# Altium PCB PCB_Power_Jack.PcbDoc
Units mm, origin at the board's own origin, x right, y up, seen from the top; angles counter-clockwise.
Board outline 33.78 x 32.13 mm, 2 copper layers (Top Layer, Bottom Layer), stack 1.571 mm thick; 9 components, 2 nets, 31 pads, 192 vias.
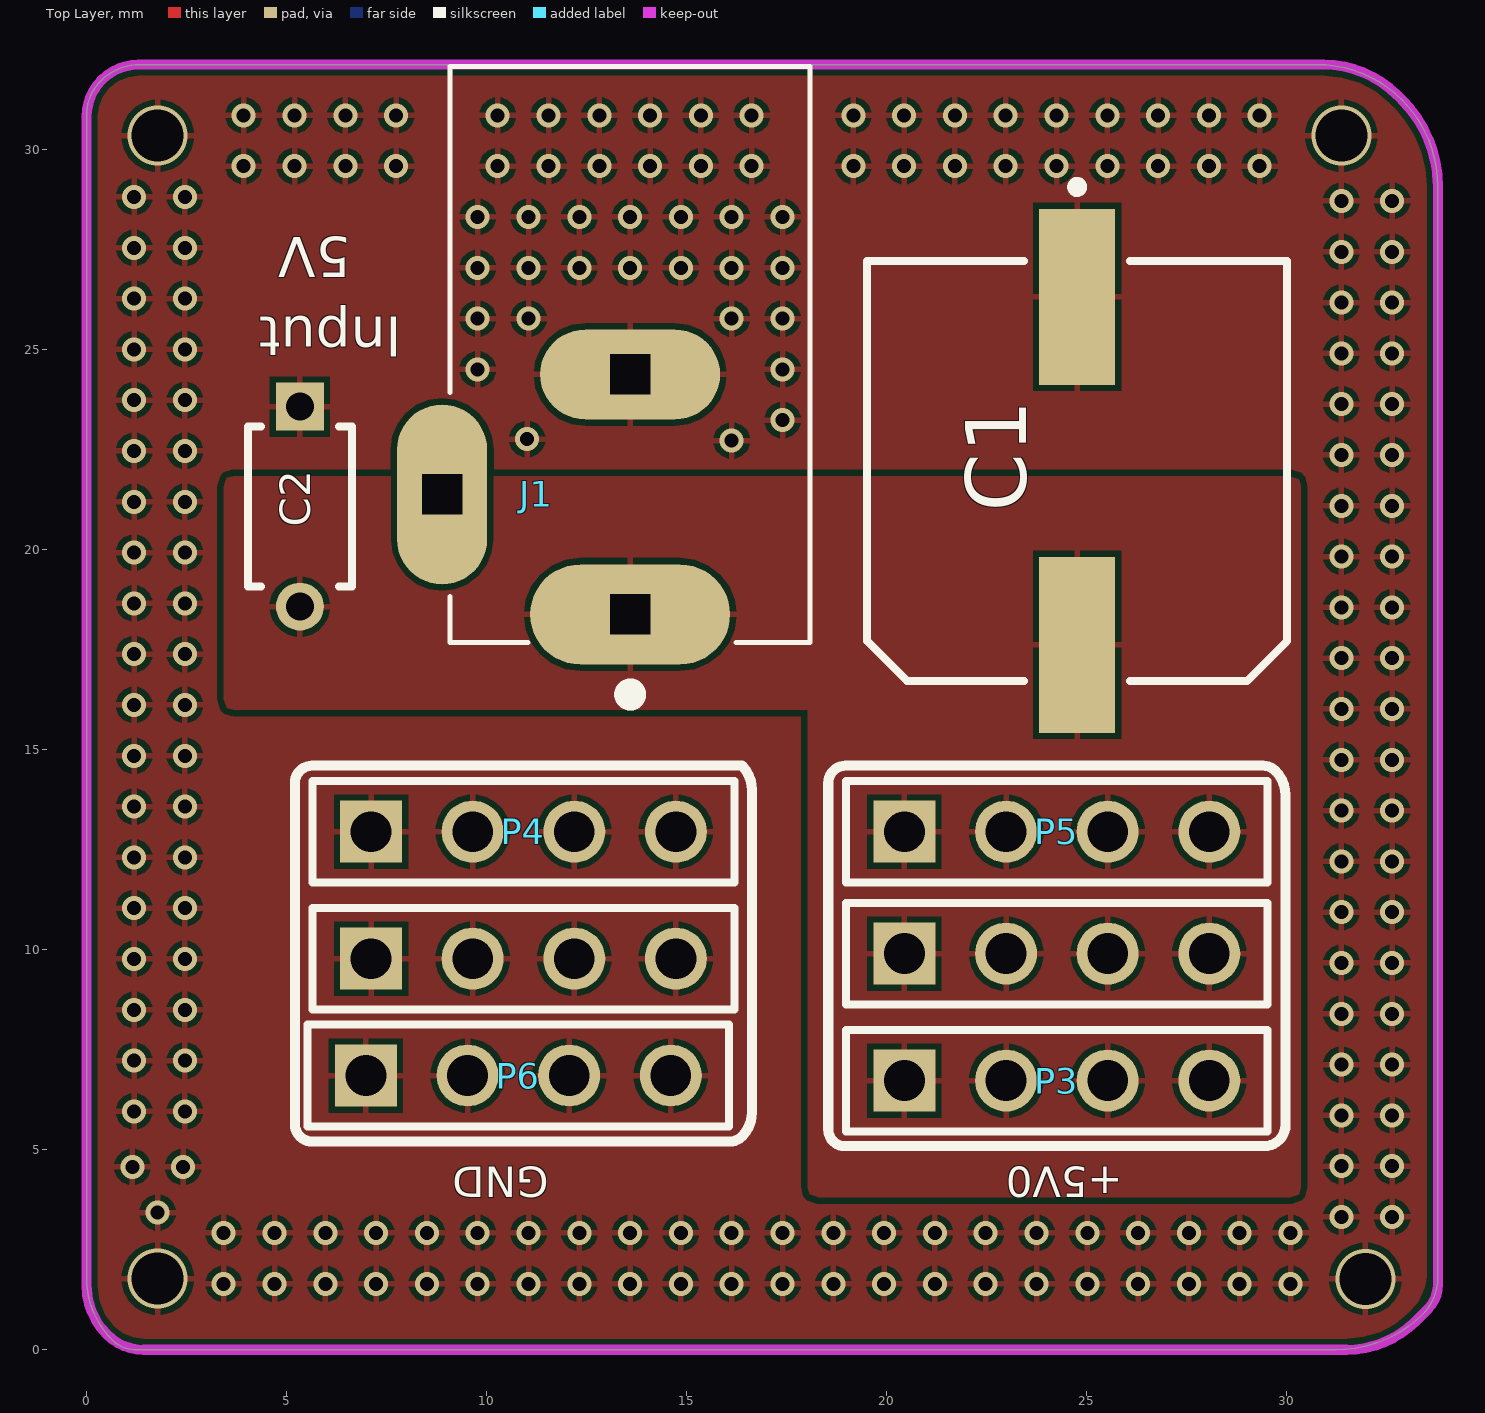
[diagram p0: Top Layer view]
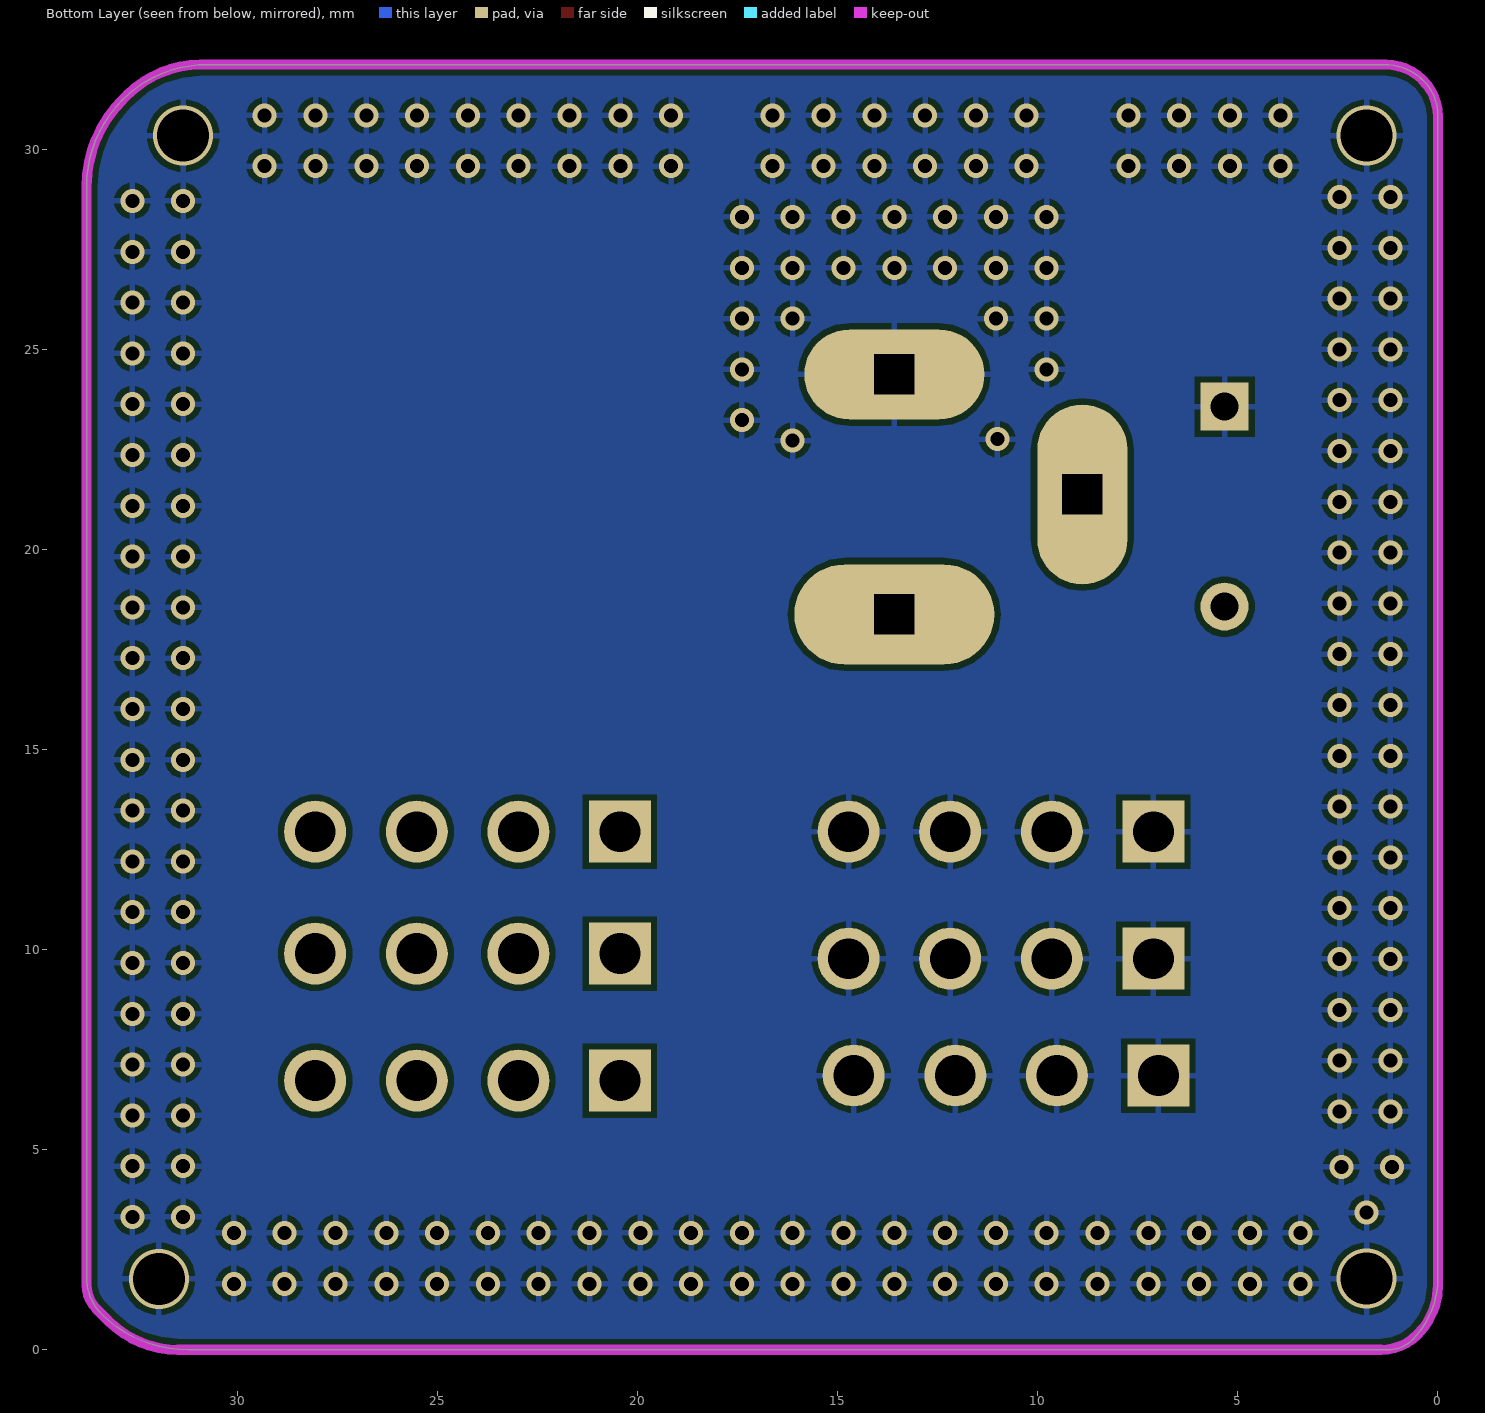
[diagram p1: Bottom Layer view, seen from below]
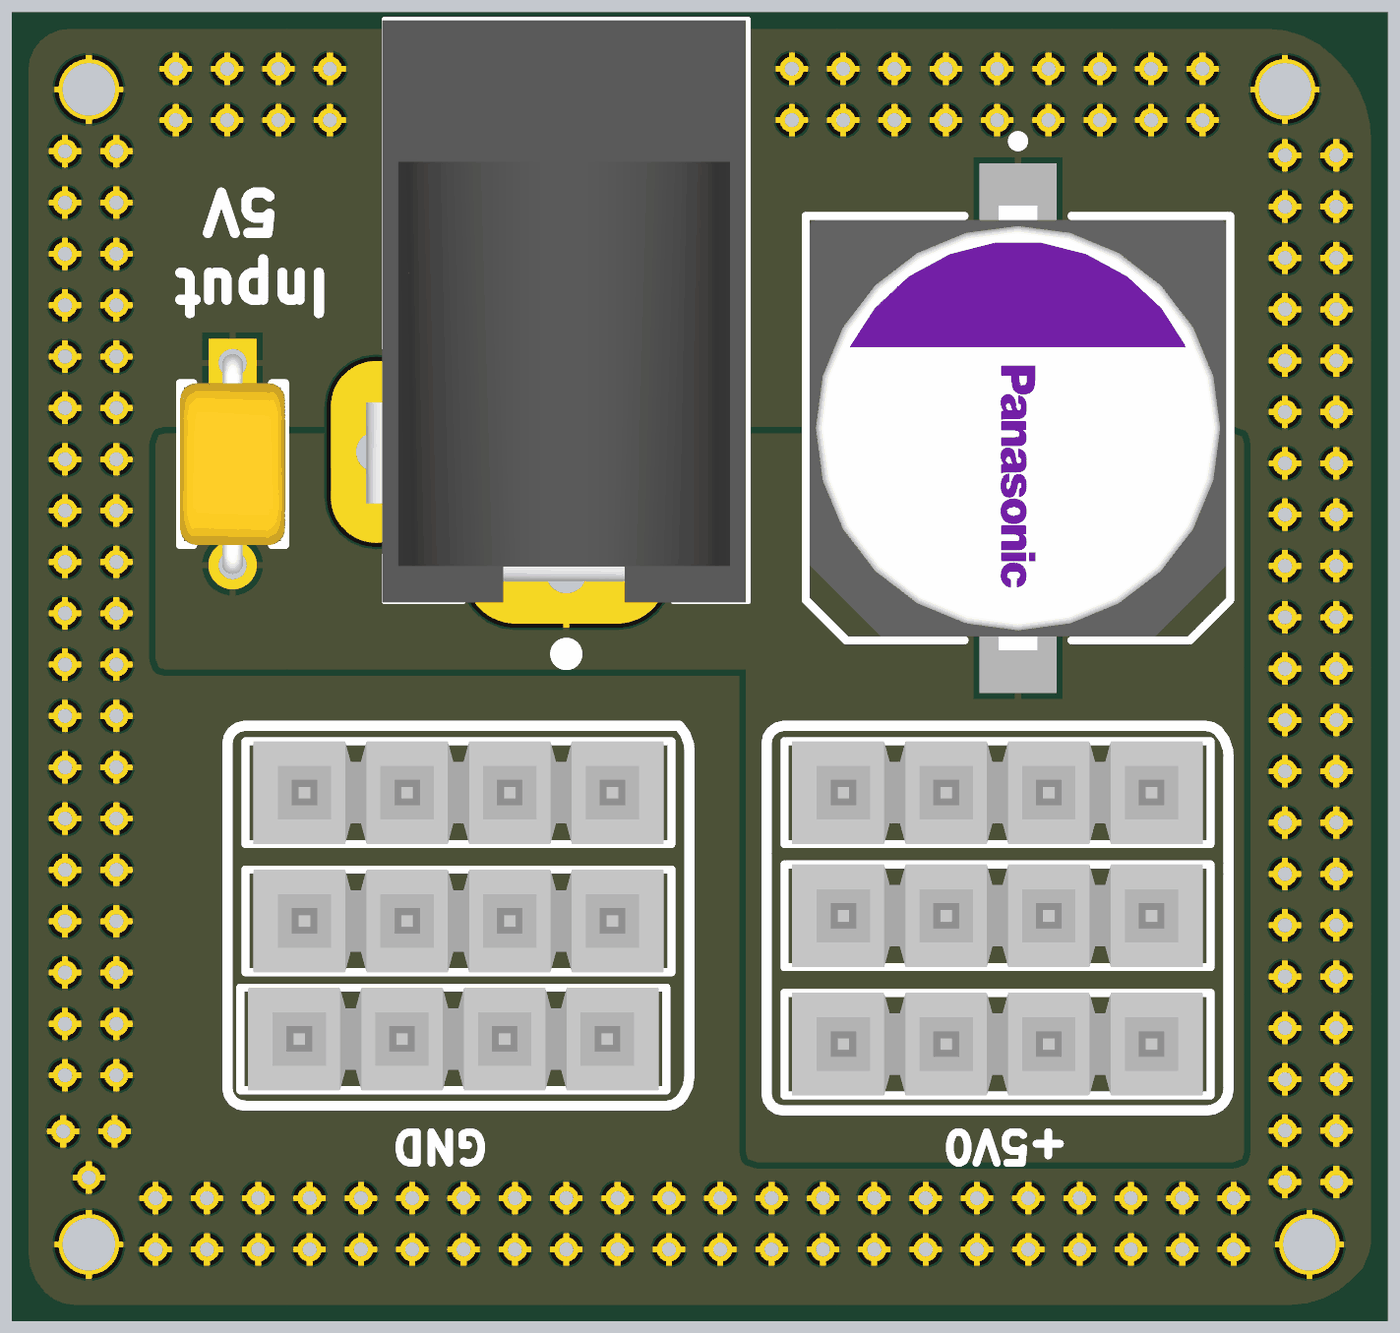
[diagram p2: 3D render of the assembled board from above, using the file's embedded part models]

## Layer stack, top to bottom
Top Solder: solder mask 0.0102, Solder Resist, Dk 3.5
Top Layer: signal copper 0.0356
Dielectric 1: dielectric 1.5, FR-4, Dk 4.8
Bottom Layer: signal copper 0.0356
Bottom Solder: solder mask 0.0102, Solder Resist, Dk 3.5

## Board outline
0.635,0.254 cw(c2.168,1.787) 0,1.787 0,30.861 cw(c1.226,30.861) 0.359,31.728 cw(c1.332,30.756) 1.332,32.131 30.76,32.131 cw(c30.76,29.127) 32.884,31.251 cw(c30.716,29.083) 33.782,29.083 33.782,1.796 cw(c32.512,1.796) 33.41,0.898 cw(c31.242,3.066) 31.242,0 1.524,0 1.248,0 cw(c1.248,0.867)

## Design rules (kind name [scope] priority, off if disabled: settings)
Clearance [All] p1: gap=0.15 ignorepadtopadclearanceinfootprint=FALSE
HoleSize HoleSize_Jack [InComponent('J1')] p1: absolutevalues=TRUE maxlimit=5 minlimit=0.025 maxpercent=80.000 minpercent=20.000
HoleSize [All] p2: absolutevalues=TRUE maxlimit=2.54 minlimit=0.025 maxpercent=80.000 minpercent=20.000
PolygonConnect [All] p1: connectstyle=Relief reliefconductorwidth=0.15 reliefentries=4 polygonreliefangle="90 Angle" airgapwidth=0.15
RoutingVias [All] p1: holewidth=0.3 width=0.4 viastyle="Through Hole" minholewidth=0.2 minwidth=0.3 maxholewidth=0.8 maxwidth=1.5
SilkToSolderMaskClearance SilkToSolderMaskClearance_Jack [InComponent('J1')] p1: minsilkscreentomaskgap=0.1 clearancetoexposedcopper=TRUE
SilkToSolderMaskClearance [IsPad] p2: minsilkscreentomaskgap=0.254 clearancetoexposedcopper=TRUE
SolderMaskExpansion [All] p1: expansion=0.102 istentingtop=FALSE
SupplyNets "Schematic Supply Nets_1" [InNet('GND')] p1: voltage=0.000
SupplyNets "Schematic Supply Nets" [InNet('+5V0')] p2: voltage=0.000
Width [All] p1: maxlimit=2 minlimit=0.254 preferedwidth=0.254 minimp=50.000000 maximp=50.000000 favimp=50.000000
28 further rules are at their usual default settings.

## Components (designator, comment, footprint, x,y, rotation, side; value= is the part's Value field where it differs from the comment)
+5V0 "TSW-104-08-G-S" SMTC-TSW-104-08-X-S 20.447,9.906 r0 top (schematic designator P1)
C1 "1000uF 16V" FP-OS-CON-SMT-F10-MFG 24.765,21.971 r270 top
C2 "Cer 0.1uF 50V" FP-K15H5-MFG 5.334,21.082 r270 top
GND "TSW-104-08-G-S" SMTC-TSW-104-08-X-S 7.112,9.779 r0 top (schematic designator P2)
J1 "PJ-002A" CUI_PJ-002A 13.589,18.384 r90 top
P3 "TSW-104-08-G-S" SMTC-TSW-104-08-X-S 20.447,6.731 r0 top
P4 "TSW-104-08-G-S" SMTC-TSW-104-08-X-S 7.112,12.954 r0 top
P5 "TSW-104-08-G-S" SMTC-TSW-104-08-X-S 20.447,12.954 r0 top
P6 "TSW-104-08-G-S" SMTC-TSW-104-08-X-S 6.985,6.858 r0 top

## Footprints (in the part's own frame and the unit in brackets; to place one, negate y for a bottom-side part, rotate by r counter-clockwise, add the part's x,y. Pads: shape width x height; smd on the part's side, far side on the other; paste and mask are expansions set on the pad)
CUI_PJ-002A [mm]
  oval 2.5x5 hole 1 square: 1(0,0)
  oval 2.25x4.5 hole 1 square: 2(6,0)
  oval 4.5x2.25 hole 1 square: 3(3,4.7)
  silkscreen extent -2.2,-4.5 13.7,4.5, body extent -0.72,-4.44 13.68,4.96, height 11.2
FP-K15H5-MFG [mm]
  rect 1.2x1.2 hole 0.7 paste-2539.97 mask+0: 1(-2.5,0)
  round 1.2 hole 0.7 paste-2539.97 mask+0: 2(2.5,0)
  silkscreen extent -2,-1.3 2,1.3, body extent -3.2,-1.4 3.2,1.4, height 0.25
FP-OS-CON-SMT-F10-MFG [mm]
  rect 4.4x1.9 smd paste+0 mask+0: 1(-4.35,0) 2(4.35,0)
  silkscreen extent -7.22,-5.25 5.25,5.25, body extent -6.8,-5.5 6.8,5.5, height 0.25
SMTC-TSW-104-08-X-S [mm] ".025 SQ Post Terminal Strip Assembly, 1x4 Pins, Vertical, 2.54mm Pitch, Male"
  rect 1.55x1.55 hole 1.02: 1(0,0)
  round 1.55 hole 1.02: 2(2.54,0) 3(5.08,0) 4(7.62,0)
  silkscreen extent -1.46,-1.27 9.08,1.27, body extent -1.27,-1.27 8.89,1.27, height 8.38

## Part data
+5V0 GND P3 P4 P5 P6: library part CMP-1024-00357-1, "0.025\" SQ Post Header, Through-hole, Vertical, -55 to 125 degC, 2.54 mm Pitch, 4-Pin, Male, RoHS", Manufacturer=Samtec, Temperature Range="-55 to 125 degC", ComponentLink1Description="Manufacturer URL", ComponentLink1URL=http://www.samtec.com, ComponentLink2Description=Datasheet, ComponentLink2URL=http://www.samtec.com/documents/webfiles/pdf/TSW_TH.PDF, ComponentLink3Description="Package Specification", ComponentLink3URL=http://www.samtec.com/documents/webfiles/cpdf/TSW-XXX-XX-XXX-X-XX-XXX-MKT.pdf, DatasheetVersion=F-214, Mounting Technology=Through-hole, Orientation=Vertical, PackageDescription=".025[0.64] SQ. Post Terminal Strip Assembly", PackageReference=TSW-104-08-X-S, PackageVersion="DM, 8/1988", PartNumber=TSW-104-08-G-S, Pitch="2.54 mm", RoHS=True
C1: library part CMP-05428-000276-1, "CAP ALUM POLY 1000UF 20% 16V SMD", RoHS Compliant=Yes
C2: library part CMP-02417-000078-1, "CAP CER 0.1UF 50V X7R RADIAL", Capacitance=100nF, Case/Package=Dipped, Dielectric=X7R, Dielectric Material=Ceramic, Max Operating Temperature=125°C, Min Operating Temperature=-55°C, Package Quantity=1, Tolerance=10%, Voltage=50V, Construction=RADIAL, Depth=2.5mm, Diameter=500um, Height=4mm, Height - Seated (Max)=0.257inch, Lead Diameter=0.5mm, Lead Free="Lead Free", Lead Length=30mm, Lead Pitch=5mm, Lead/Base Style="Formed Leads", Length=4mm, Mount="Through Hole", Packaging="Tape and Reel", Radiation Hardening=No, RoHS Compliant=Yes, Series=K, Termination=Radial, Thickness=2.6mm, Voltage Rating=50V, Voltage Rating (DC)=50V, Weight=0.005644oz, Width=2.5mm
J1: "2.0 x 6.5 mm, 2.5 A, Horizontal, Through Hole, Dc Power Jack Connector", Package=None, Check_prices=https://www.snapeda.com/parts/PJ-002A/Same+Sky/view-part/?ref=eda, MF="Same Sky", MP=PJ-002A, SnapEDA_Link=https://www.snapeda.com/parts/PJ-002A/Same+Sky/view-part/?ref=snap

## Via types
v1: diameter 0.6, hole 0.35, Top Layer to Bottom Layer, 188 vias
v2: diameter 1.5, hole 1.3, Top Layer to Bottom Layer, 4 vias

## Nets (pads, with @x,y where several pads share a name; then routed paths per layer and width w, separated by ;. In a path a pad name is that pad's centre, name@x,y a point inside that pad or via, vN(x,y) a via of type N, cw(c..) or ccw(c..) an arc to the next point about the centre after c; other vN are vias at no path point)
+5V0: +5V0.1 +5V0.2 +5V0.3 +5V0.4 C1.2 C2.2 J1.1 P3.1 P3.2 P3.3 P3.4 P5.1 P5.2 P5.3 P5.4
GND: C1.1 C2.1 GND.1 GND.2 GND.3 GND.4 J1.2 P4.1 P4.2 P4.3 P4.4 P6.1 P6.2 P6.3 P6.4
  other v1: 3.429,1.651 4.699,1.651 5.969,1.651 7.239,1.651 8.509,1.651 9.779,1.651 11.049,1.651 12.319,1.651 13.589,1.651 14.859,1.651 16.129,1.651 17.399,1.651 18.669,1.651 19.939,1.651 21.209,1.651 22.479,1.651 23.749,1.651 25.019,1.651 26.289,1.651 27.559,1.651 28.829,1.651 30.099,1.651 3.429,2.921 4.699,2.921 5.969,2.921 7.239,2.921 8.509,2.921 9.779,2.921 11.049,2.921 12.319,2.921 13.589,2.921 14.859,2.921 16.129,2.921 17.399,2.921 18.669,2.921 19.939,2.921 21.209,2.921 22.479,2.921 23.749,2.921 25.019,2.921 26.289,2.921 27.559,2.921 28.829,2.921 30.099,2.921 31.369,3.321 32.639,3.321 1.778,3.429 1.143,4.572 2.413,4.572 31.369,4.591 32.639,4.591 31.369,5.861 32.639,5.861 1.189,5.961 2.459,5.961 31.369,7.131 32.639,7.131 1.189,7.231 2.459,7.231 31.369,8.401 32.639,8.401 1.189,8.501 2.459,8.501 31.369,9.671 32.639,9.671 1.189,9.771 2.459,9.771 31.369,10.941 32.639,10.941 1.189,11.041 2.459,11.041 31.369,12.211 32.639,12.211 1.189,12.311 2.459,12.311 31.369,13.481 32.639,13.481 1.189,13.581 2.459,13.581 31.369,14.751 32.639,14.751 1.189,14.851 2.459,14.851 31.369,16.021 32.639,16.021 1.189,16.121 2.459,16.121 31.369,17.291 32.639,17.291 1.189,17.391 2.459,17.391 31.369,18.561 32.639,18.561 1.189,18.661 2.459,18.661 31.369,19.831 32.639,19.831 1.189,19.931 2.459,19.931 31.369,21.101 32.639,21.101 1.189,21.201 2.459,21.201 31.369,22.371 32.639,22.371 1.189,22.471 2.459,22.471 16.129,22.733 11.014,22.765 17.399,23.241 31.369,23.641 32.639,23.641 1.189,23.741 2.459,23.741 9.779,24.511 17.399,24.511 31.369,24.911 32.639,24.911 1.189,25.011 2.459,25.011 9.779,25.781 11.049,25.781 16.129,25.781 17.399,25.781 31.369,26.181 32.639,26.181 1.189,26.281 2.459,26.281 9.779,27.051 11.049,27.051 12.319,27.051 13.589,27.051 14.859,27.051 16.129,27.051 17.399,27.051 31.369,27.451 32.639,27.451 1.189,27.551 2.459,27.551 9.779,28.321 11.049,28.321 12.319,28.321 13.589,28.321 14.859,28.321 16.129,28.321 17.399,28.321 31.369,28.721 32.639,28.721 1.189,28.821 2.459,28.821 3.929,29.591 5.199,29.591 6.469,29.591 7.739,29.591 10.279,29.591 11.549,29.591 12.819,29.591 14.089,29.591 15.359,29.591 16.629,29.591 19.169,29.591 20.439,29.591 21.709,29.591 22.979,29.591 24.249,29.591 25.519,29.591 26.789,29.591 28.059,29.591 29.329,29.591 3.929,30.861 5.199,30.861 6.469,30.861 7.739,30.861 10.279,30.861 11.549,30.861 12.819,30.861 14.089,30.861 15.359,30.861 16.629,30.861 19.169,30.861 20.439,30.861 21.709,30.861 22.979,30.861 24.249,30.861 25.519,30.861 26.789,30.861 28.059,30.861 29.329,30.861
  other v2: 1.778,1.778 31.973,1.776 1.778,30.353 31.369,30.353
pads on no net: J1.3

## Polygon pours and split planes (outlines as drawn)
GND on Top Layer "GND_L01_P001" (solid, pour order 1): 0.254,30.861 cw(c1.27,30.861) 1.27,31.877 30.988,31.877 cw(c30.988,29.337) 33.528,29.337 33.528,2.159 cw(c31.496,2.159) 31.496,0.127 1.778,0.127 cw(c1.778,1.651) 0.254,1.651 0.254,28.194
+5V0 on Top Layer "+5V0_L01_P000" (solid, pour order 0): 3.429,16.002 18.034,16.002 18.034,3.81 30.353,3.81 30.353,21.844 3.429,21.844
GND on Bottom Layer "GND_L02_P002" (solid, pour order 2): 0.254,29.464 0.254,31.115 cw(c1.143,31.115) 1.143,32.004 31.115,32.004 cw(c31.115,29.464) 33.655,29.464 33.655,2.032 cw(c31.75,2.032) 31.75,0.127 1.651,0.127 cw(c1.651,1.651) 0.127,1.651

## Keep-outs
Keep-Out Layer:
  lines w0.254: 0,1.607 ccw(c1.734,1.607) 0.508,0.381 ccw(c1.428,1.301) 1.428,0 31.496,0 ccw(c31.496,2.453) 33.23,0.718 33.528,1.016 ccw(c32.915,1.629) 33.782,1.629 33.782,29.083 ccw(c30.716,29.083) 32.884,31.251 32.766,31.369 ccw(c30.926,29.529) 30.926,32.131 1.301,32.131 ccw(c1.301,30.83) 0.381,31.75 ccw(c1.301,30.83) 0,30.83 0,1.905 0,1.607

## Silkscreen, mask and mechanical layers (free items; w line width, h text height)
Top Overlay:
  lines w0.254: 5.207,5.641 ccw(c5.641,5.641) 5.334,5.334 ccw(c5.641,5.641) 5.641,5.207 5.842,5.207 16.076,5.207 ccw(c16.076,5.641) 16.383,5.334 ccw(c15.77,5.947) 16.637,5.947 16.637,8.562 16.637,13.992 ccw(c15.77,13.992) 16.383,14.605 5.641,14.605 ccw(c5.641,14.171) 5.334,14.478 ccw(c5.641,14.171) 5.207,14.171 5.207,8.868 5.207,5.842 5.207,5.641 ; 18.542,5.514 ccw(c18.976,5.514) 18.669,5.207 ccw(c18.947,5.485) 18.947,5.092 29.441,5.092 ccw(c29.441,5.623) 29.972,5.623 29.972,10.922 29.972,11.176 29.972,13.843 29.972,13.865 ccw(c29.105,13.865) 29.718,14.478 ccw(c29.411,14.171) 29.411,14.605 29.232,14.605 18.976,14.605 ccw(c18.976,14.171) 18.669,14.478 ccw(c18.976,14.171) 18.542,14.171 18.542,13.843 18.542,11.43 18.542,5.842 18.542,5.514
  text "5V" at 6.604,27.813 h1 r180
  text "Input" at 7.874,25.829 h1 r180
Board Outline:
  lines w0.254: 0,1.787 ccw(c2.168,1.787) 0.635,0.254 ccw(c1.248,0.867) 1.248,0 1.524,0 31.524,0 ccw(c31.524,2.385) 33.211,0.698 33.41,0.898 ccw(c32.512,1.796) 33.782,1.796 33.782,29.083 ccw(c30.716,29.083) 32.884,31.251 ccw(c30.76,29.127) 30.76,32.131 9.144,32.131 1.332,32.131 ccw(c1.332,30.756) 0.359,31.728 ccw(c1.226,30.861) 0,30.861 0,1.84 0,1.787